# EAGLE board CT_schematic (EAGLE 7.6.0)

Size 100 x 80 mm. Coordinates in mm from the lower left corner, seen from the top.
Outline: 0,0 100,0 100,80 0,80 0,0
Copper layers (1*16): Top 0.035mm / dielectric 1.5mm / Bottom 0.035mm
Design rules "default": minimum track width 10mil, minimum drill 24mil, track to track 8mil, track to pad 8mil, pad to pad 8mil, via to via 8mil, smd to smd 8mil, copper to edge 40mil, drill to drill 8mil, minimum pad ring 10mil, minimum via ring 8mil, stop-mask expansion 4mil, vias tented up to drill 0mil, thermal gap 10mil

## Footprints (pad centres in the part's own frame; a part is rotated, then mirrored left to right if it is on the bottom)
C0603 = smd 0.8 x 0.8: 1 -0.762,0; 2 0.762,0
C0402 = smd 0.5 x 0.5: 1 -0.508,0; 2 0.508,0
C1206 = smd 1.3 x 1.6: 1 -1.524,0; 2 1.524,0
C0805 = smd 1.2 x 1.3: 1 -1.016,0; 2 1.016,0
C1210 = smd 1.2 x 2.5: 1 -1.524,0; 2 1.524,0
EXV-9H = smd 3.505 x 1.676: 1 -2.857,0; 2 2.857,0
L0603 = smd 0.8 x 0.8: 1 -0.762,0; 2 0.762,0
L1210 = smd 1.2 x 2.5: 1 -1.524,0; 2 1.524,0
PJ-037B_PACKAGE = drill 3.7 square: 1 12,0 | drill 3.2 square: 2 6,0
R0603 = smd 0.8 x 0.8: 1 -0.762,0; 2 0.762,0
WLCSP180 = smd 0.225 x 0.225: A1 -2.4,2.6; A2 -2,2.6; A3 -1.6,2.6; A4 -1.2,2.6; A5 -0.8,2.6; A6 -0.4,2.6; A7 0,2.6; A8 0.4,2.6; A9 0.8,2.6; A10 1.2,2.6; A11 1.6,2.6; A12 2,2.6; A13 2.4,2.6; B1 -2.4,2.2; B2 -2,2.2; B3 -1.6,2.2; B4 -1.2,2.2; B5 -0.8,2.2; B6 -0.4,2.2; B7 0,2.2; B8 0.4,2.2; B9 0.8,2.2; B10 1.2,2.2; B11 1.6,2.2; B12 2,2.2; B13 2.4,2.2; C1 -2.4,1.8; C2 -2,1.8; C3 -1.6,1.8; C4 -1.2,1.8; C5 -0.8,1.8; C6 -0.4,1.8; C7 0,1.8; C8 0.4,1.8; C9 0.8,1.8; C10 1.2,1.8; C11 1.6,1.8; C12 2,1.8; C13 2.4,1.8; D1 -2.4,1.4; D2 -2,1.4; D3 -1.6,1.4; D4 -1.2,1.4; D5 -0.8,1.4; D6 -0.4,1.4; D7 0,1.4; D8 0.4,1.4; D9 0.8,1.4; D10 1.2,1.4; D11 1.6,1.4; D12 2,1.4; D13 2.4,1.4; E1 -2.4,1; E2 -2,1; E3 -1.6,1; E4 -1.2,1; E5 -0.8,1; E6 -0.4,1; E7 0,1; E8 0.4,1; E9 0.8,1; E10 1.2,1; E11 1.6,1; E12 2,1; E13 2.4,1; F1 -2.4,0.6; F2 -2,0.6; F3 -1.6,0.6; F4 -1.2,0.6; F5 -0.8,0.6; F6 -0.4,0.6; F7 0,0.6; F8 0.4,0.6; F9 0.8,0.6; F10 1.2,0.6; F11 1.6,0.6; F12 2,0.6; F13 2.4,0.6; G1 -2.4,0.2; G2 -2,0.2; G3 -1.6,0.2; G4 -1.2,0.2; G5 -0.8,0.2; G6 -0.4,0.2; G8 0.4,0.2; G9 0.8,0.2; G10 1.2,0.2; G11 1.6,0.2; G12 2,0.2; G13 2.4,0.2; H1 -2.4,-0.2; H2 -2,-0.2; H3 -1.6,-0.2; H4 -1.2,-0.2; H5 -0.8,-0.2; H6 -0.4,-0.2; H8 0.4,-0.2; H9 0.8,-0.2; H10 1.2,-0.2; H11 1.6,-0.2; H12 2,-0.2; H13 2.4,-0.2; J1 -2.4,-0.6; J2 -2,-0.6; J3 -1.6,-0.6; J4 -1.2,-0.6; J5 -0.8,-0.6; J6 -0.4,-0.6; J7 0,-0.6; J8 0.4,-0.6; J9 0.8,-0.6; J10 1.2,-0.6; J11 1.6,-0.6; J12 2,-0.6; J13 2.4,-0.6; K1 -2.4,-1; K2 -2,-1; K3 -1.6,-1; K4 -1.2,-1; K5 -0.8,-1; K6 -0.4,-1; K7 0,-1; K8 0.4,-1; K9 0.8,-1; K10 1.2,-1; K11 1.6,-1; K12 2,-1; K13 2.4,-1; L1 -2.4,-1.4; L2 -2,-1.4; L3 -1.6,-1.4; L4 -1.2,-1.4; L5 -0.8,-1.4; L6 -0.4,-1.4; L7 0,-1.4; L8 0.4,-1.4; L9 0.8,-1.4; L10 1.2,-1.4; L11 1.6,-1.4; L12 2,-1.4; L13 2.4,-1.4; M1 -2.4,-1.8; M2 -2,-1.8; M3 -1.6,-1.8; M4 -1.2,-1.8; M5 -0.8,-1.8; M6 -0.4,-1.8; M7 0,-1.8; M8 0.4,-1.8; M9 0.8,-1.8; M10 1.2,-1.8; M11 1.6,-1.8; M12 2,-1.8; M13 2.4,-1.8; N1 -2.4,-2.2; N2 -2,-2.2; N3 -1.6,-2.2; N4 -1.2,-2.2; N5 -0.8,-2.2; N6 -0.4,-2.2; N7 0,-2.2; N8 0.4,-2.2; N9 0.8,-2.2; N10 1.2,-2.2; N11 1.6,-2.2; N12 2,-2.2; N13 2.4,-2.2; P1 -2.4,-2.6; P2 -2,-2.6; P3 -1.6,-2.6; P4 -1.2,-2.6; P5 -0.8,-2.6; P6 -0.4,-2.6; P7 0,-2.6; P8 0.4,-2.6; P9 0.8,-2.6; P10 1.2,-2.6; P11 1.6,-2.6; P12 2,-2.6; P13 2.4,-2.6
SOIC-8 = smd 1.6 x 0.6: 1 -2.7,1.905 | smd 1.55 x 0.6: 2 -2.7,0.635; 3 -2.7,-0.635; 4 -2.7,-1.905; 5 2.7,-1.905; 6 2.7,-0.635; 7 2.7,0.635; 8 2.7,1.905
LH430WV2-SD01 = smd 0.23 x 0.7: 1 0,0; 2 -0.4,0; 3 -0.8,0; 4 -1.2,0; 5 -1.6,0; 6 -2,0; 7 -2.4,0; 8 -2.8,0; 9 -3.2,0; 10 -3.6,0; 11 -4,0; 12 -4.4,0; 13 -4.8,0; 14 -5.2,0; 15 -5.6,0; 16 -5.6,-2.15; 17 -5.2,-2.15; 18 -4.8,-2.15; 19 -4.4,-2.15; 20 -4,-2.15; 21 -3.6,-2.15; 22 -3.2,-2.15; 23 -2.8,-2.15; 24 -2.4,-2.15; 25 -2,-2.15; 26 -1.6,-2.15; 27 -1.2,-2.15; 28 -0.8,-2.15; 29 -0.4,-2.15; 30 0,-2.15
TDFN-8/6MM = smd 0.3 x 0.75: 1 0,0; 2 0.5,0; 3 1,0; 4 1.5,0; 5 1.5,3; 6 1,3; 7 0.5,3; 8 0,3
WFDN-8 = smd 0.48 x 0.7: 1 0,0; 2 1.27,0; 3 2.54,0; 4 3.81,0; 5 3.81,4.45; 6 2.54,4.45; 7 1.27,4.45; 8 0,4.45 | smd 4 x 3: 9 1.89,2.25
ABS07-32.768KHZ-7-T = smd 1.1 x 2.4: 1 -2.5,0; 2 0,0
ASFL1 = smd 1.7 x 1.5: 1 -1.27,-1.1; 2 1.27,-1.1; 3 1.27,1.1; 4 -1.27,1.1
WSON-8 = smd 0.3 x 0.6: 1 -0.75,0; 2 0.05,0; 3 0.85,0; 4 1.65,0; 5 1.65,3.8; 6 0.85,3.8; 7 0.05,3.8; 8 -0.75,3.8 | smd 3 x 2.6: PAD 0.45,1.9
SOIC-8_EP = smd 1.6 x 0.533: 1 -2.921,1.905; 2 -2.921,0.635; 3 -2.921,-0.635; 4 -2.921,-1.905; 5 2.921,-1.905; 6 2.921,-0.635; 7 2.921,0.635; 8 2.921,1.905 | smd 2.54 x 3.302: EPAD 0,0 | drill 0.406 pad 0.406: P$1 -0.508,0.635; P$2 0.381,0.635; P$3 -0.508,-0.635; P$4 0.381,-0.635
DFN-8_DDB = smd 0.805 x 0.3: 1 -0.952,0.75; 2 -0.952,0.25; 3 -0.952,-0.25; 4 -0.952,-0.75; 5 0.952,-0.75; 6 0.952,-0.25; 7 0.952,0.25; 8 0.952,0.75 | smd 0.61 x 2.2: 9 0,0
SON-6 = smd 0.55 x 0.3: 1 -0.355,0.5 | smd 0.52 x 0.3: 2 -0.37,0; 3 -0.37,-0.5; 4 0.37,-0.5; 5 0.37,0; 6 0.37,0.5
SW_4-1437565-2 = smd 1.4 x 2.1: 1 -2.23,4.55; 2 -2.23,-4.55; 3 2.23,4.55; 4 2.23,-4.55
LGM67K-G1J2-24-Z = smd 0.8 x 1.4: A -2,0; C 0,0
NC7SZ125M5X = smd 1.3 x 0.7: 1 -1.3,0.95; 2 -1.3,0; 3 -1.3,-0.95; 4 1.3,-0.95; 5 1.3,0.95

## Placement (x,y rotation side)
C1  1e-06  [C0603]  -15.24,63.5 0 top  (outside the outline)
C2  1e-07  [C0603]  -19.05,63.5 0 top  (outside the outline)
C3  1e-07  [C0603]  -22.86,63.5 0 top  (outside the outline)
C4  1e-07  [C0603]  -26.67,63.5 0 top  (outside the outline)
C5  1e-07  [C0603]  -30.48,63.5 0 top  (outside the outline)
C6  1e-07  [C0603]  -34.29,63.5 0 top  (outside the outline)
C7  1e-07  [C0603]  -38.1,63.5 0 top  (outside the outline)
C8  1e-07  [C0603]  -41.91,63.5 0 top  (outside the outline)
C9  1e-07  [C0603]  -45.72,63.5 0 top  (outside the outline)
C10  4.7e-06  [C0603]  -64.77,58.42 0 top  (outside the outline)
C11  1e-07  [C0603]  -49.53,63.5 0 top  (outside the outline)
C12  1e-08  [C0603]  -53.34,63.5 0 top  (outside the outline)
C13  1e-06  [C0603]  -57.15,63.5 0 top  (outside the outline)
C14  1e-07  [C0603]  -60.96,63.5 0 top  (outside the outline)
C15  2.2e-06  [C0603]  -68.58,58.42 0 top  (outside the outline)
C16  1e-07  [C0603]  -64.77,63.5 0 top  (outside the outline)
C17  1e-07  [C0603]  -68.58,63.5 0 top  (outside the outline)
C18  1e-11  [C0402]  -15.24,73.66 0 top  (outside the outline)
C19  1e-11  [C0402]  -19.05,73.66 0 top  (outside the outline)
C20  1e-08  [C0402]  -22.86,73.66 0 top  (outside the outline)
C21  1e-07  [C0402]  -26.67,73.66 0 top  (outside the outline)
C22  1e-07  [C0402]  -30.48,73.66 0 top  (outside the outline)
C23  1e-07  [C0402]  -34.29,73.66 0 top  (outside the outline)
C24  1e-07  [C0402]  -38.1,73.66 0 top  (outside the outline)
C25  1e-07  [C0402]  -41.91,73.66 0 top  (outside the outline)
C26  1e-08  [C0402]  -45.72,73.66 0 top  (outside the outline)
C27  1e-07  [C0402]  -49.53,73.66 0 top  (outside the outline)
C28  1e-08  [C0402]  -53.34,73.66 0 top  (outside the outline)
C29  1e-08  [C0402]  -57.15,73.66 0 top  (outside the outline)
C30  1e-05  [C1206]  -67.31,45.72 0 top  (outside the outline)
C31  1e-05  [C0805]  -34.29,53.34 0 top  (outside the outline)
C32  1e-05  [C1210]  -16.51,46.99 0 top  (outside the outline)
C33  1e-05  [C1210]  -22.86,46.99 0 top  (outside the outline)
C34  1e-05  [C1210]  -29.21,46.99 0 top  (outside the outline)
C35  1e-05  [C1210]  -35.56,46.99 0 top  (outside the outline)
C36  1e-08  [C0402]  -60.96,73.66 0 top  (outside the outline)
C37  1e-05  [C1206]  -73.66,45.72 0 top  (outside the outline)
C38  1e-05  [C1210]  -41.91,46.99 0 top  (outside the outline)
C39  1e-08  [C0402]  -64.77,73.66 0 top  (outside the outline)
C40  1e-05  [C1206]  -16.51,53.34 0 top  (outside the outline)
C41  1e-05  [C1210]  -48.26,46.99 0 top  (outside the outline)
C42  1e-05  [C1210]  -54.61,46.99 0 top  (outside the outline)
C43  2.2e-06  [C0603]  -72.39,58.42 0 top  (outside the outline)
C44  2.2e-07  [C0603]  -76.2,58.42 0 top  (outside the outline)
C45  1e-07  [C0402]  -68.58,73.66 0 top  (outside the outline)
C46  0.0001  [EXV-9H]  -17.78,39.37 0 top  (outside the outline)
C47  0.0001  [EXV-9H]  -29.21,39.37 0 top  (outside the outline)
C48  1e-08  [C0402]  -72.39,73.66 0 top  (outside the outline)
C49  1e-08  [C0402]  -76.2,73.66 0 top  (outside the outline)
F1  240.0  [L0603]  -72.39,63.5 0 top  (outside the outline)
I1  1e-05  [L1210]  -60.96,46.99 0 top  (outside the outline)
J1  PJ-037B  [PJ-037B_PACKAGE]  -27.94,7.62 0 top  (outside the outline)
R2  1000.0  [R0603]  -76.2,63.5 0 top  (outside the outline)
R4  4700.0  [R0603]  -15.24,68.58 0 top  (outside the outline)
R5  4700.0  [R0603]  -19.05,68.58 0 top  (outside the outline)
R6  2200.0  [R0603]  -22.86,68.58 0 top  (outside the outline)
R7  2200.0  [R0603]  -26.67,68.58 0 top  (outside the outline)
R8  2200.0  [R0603]  -30.48,68.58 0 top  (outside the outline)
R9  10000.0  [R0603]  -25.4,58.42 0 top  (outside the outline)
R10  10000.0  [R0603]  -30.48,58.42 0 top  (outside the outline)
R11  10000.0  [R0603]  -35.56,58.42 0 top  (outside the outline)
R12  10000.0  [R0603]  -40.64,58.42 0 top  (outside the outline)
R13  10000.0  [R0603]  -45.72,58.42 0 top  (outside the outline)
R14  10000.0  [R0603]  -50.8,58.42 0 top  (outside the outline)
R15  100000.0  [R0603]  -44.45,52.07 0 top  (outside the outline)
R16  100000.0  [R0603]  -49.53,52.07 0 top  (outside the outline)
R17  100000.0  [R0603]  -54.61,52.07 0 top  (outside the outline)
R18  100000.0  [R0603]  -59.69,52.07 0 top  (outside the outline)
R19  200.0  [R0603]  -34.29,68.58 0 top  (outside the outline)
R20  1000.0  [R0603]  -38.1,68.58 0 top  (outside the outline)
R21  910.0  [R0603]  -41.91,68.58 0 top  (outside the outline)
R22  2200.0  [R0603]  -45.72,68.58 0 top  (outside the outline)
R23  100000.0  [R0603]  -64.77,52.07 0 top  (outside the outline)
R24  1800.0  [R0603]  -49.53,68.58 0 top  (outside the outline)
R25  1000.0  [R0603]  -53.34,68.58 0 top  (outside the outline)
R26  100000.0  [R0603]  -69.85,52.07 0 top  (outside the outline)
R27  2231.0  [R0603]  -57.15,68.58 0 top  (outside the outline)
R28  1000.0  [R0603]  -60.96,68.58 0 top  (outside the outline)
R29  100000.0  [R0603]  -74.93,52.07 0 top  (outside the outline)
R30  1600000.0  [R0603]  -39.37,52.07 0 top  (outside the outline)
R31  10000.0  [R0603]  -55.88,58.42 0 top  (outside the outline)
R32  10000.0  [R0603]  -60.96,58.42 0 top  (outside the outline)
R33  9100.0  [R0603]  -64.77,68.58 0 top  (outside the outline)
R34  680000.0  [R0603]  -15.24,58.42 0 top  (outside the outline)
R35  120000.0  [R0603]  -20.32,58.42 0 top  (outside the outline)
U1  STM32F779AIY6TR  [WLCSP180]  -16.51,19.05 0 top  (outside the outline)
U2  AT25160B-SSHL-T  [SOIC-8]  -48.26,19.05 0 top  (outside the outline)
U3  LH430WV2-SD01  [LH430WV2-SD01]  -68.58,69.85 0 top  (outside the outline)
U4  24AA02T-I/MNY  [TDFN-8/6MM]  -33.02,19.05 0 top  (outside the outline)
U5  SST26VF032B-104I/MF  [WFDN-8]  -67.31,3.81 0 top  (outside the outline)
U6  ABS07-32.768KHZ-7-T  [ABS07-32.768KHZ-7-T]  -50.8,39.37 0 top  (outside the outline)
U7  ASFL1-25MHZ-NCS  [ASFL1]  -67.31,30.48 0 top  (outside the outline)
U8  LP3878SDX-ADJ/NOPB  [WSON-8]  -69.85,17.78 0 top  (outside the outline)
U9  MIC5234YME  [SOIC-8_EP]  -59.69,38.1 0 top  (outside the outline)
U10  LP3878SDX-ADJ/NOPB  [WSON-8]  -30.48,27.94 0 top  (outside the outline)
U11  LP3878SDX-ADJ/NOPB  [WSON-8]  -50.8,27.94 0 top  (outside the outline)
U12  LT3494AEDDB#TRMPBF  [DFN-8_DDB]  -15.24,77.47 0 top  (outside the outline)
U13  TPS3895ADRYR  [SON-6]  -20.32,77.47 0 top  (outside the outline)
U14  4-1437565-2  [SW_4-1437565-2]  -44.45,6.35 0 top  (outside the outline)
U15  Q65110A2395  [LGM67K-G1J2-24-Z]  -68.58,38.1 0 top  (outside the outline)
U16  nc7sz125m5x  [NC7SZ125M5X]  -21.59,52.07 0 top  (outside the outline)
U17  nc7sz125m5x  [NC7SZ125M5X]  -27.94,52.07 0 top  (outside the outline)

## Library data of the parts
C1-C49 F1 I1 J1 R2 R4-R35 U1-U17 = circuit_tree

## Nets
CLK_CRYSTAL_U1_E12: C18.1 U1.E12 U6.1
CLK_CRYSTAL_U1_E13: C19.1 U1.E13 U6.2
CLK_U1_K12: U1.K12 U7.3
GND: C1.2 C2.2 C3.2 C4.2 C5.2 C6.2 C7.2 C8.2 C9.2 C10.2 C11.2 C12.2 C13.2 C14.2 C15.2 C16.2 C17.2 C18.2 C19.2 C20.2 C21.2 C22.2 C23.2 C24.2 C25.2 C26.2 C27.2 C28.2 C29.2 C30.2 C31.2 C32.2 C33.2 C34.2 C35.2 C36.2 C37.2 C38.2 C39.2 C40.2 C41.2 C42.2 C43.2 C44.2 C45.2 C46.2 C47.2 C48.2 C49.2 J1.2 R2.2 R9.2 R14.2 R20.2 R22.2 R25.2 R28.2 R33.2 R35.2 U1.A8 U1.A11 U1.B6 U1.C2 U1.F1 U1.F13 U1.H5 U1.J9 U1.J13 U1.M1 U1.M11 U1.N4 U1.N5 U1.P9 U2.4 U3.1 U3.6 U3.9 U3.12 U3.15 U3.17 U3.18 U3.19 U3.24 U3.27 U4.4 U4.7 U5.4 U5.9 U7.2 U8.3 U8.PAD U9.7 U9.EPAD U10.3 U10.PAD U11.3 U11.PAD U12.2 U12.9 U13.2 U15.C U16.1 U16.3 U17.1 U17.3
NET_U1_A10: R9.1 U1.A10
NET_U1_B9: R6.1 U1.B9 U4.6
NET_U1_C1: C17.1 U1.C1
NET_U1_C8: R7.1 U1.C8 U4.5
NET_U1_C10: R10.1 U1.C10
NET_U1_J3: C15.1 U1.H6 U1.J3
NET_U1_L11: R5.1 U1.L11 U17.4
NET_U1_M12: C12.1 C13.1 F1.1 U1.M12
NET_U1_P10: U15.A
NET_U1_P11: U14.3 U14.4
NET_U2_3: R11.1 U2.3
NET_U2_7: R13.1 U2.7
NET_U3_4: R4.1 U3.4 U16.4
NET_U3_5: R8.1
NET_U3_20: R14.1 U3.20
NET_U8_1: C29.1 U8.1
NET_U8_6: R19.2 R20.1 U8.6
NET_U8_8: R18.1 U8.8
NET_U9_4: R21.2 R22.1 U9.4
NET_U10_1: C36.1 U10.1
NET_U10_6: R24.2 R25.1 U10.6
NET_U10_8: R23.1 U10.8
NET_U11_1: C39.1 U11.1
NET_U11_6: R27.2 R28.1 U11.6
NET_U11_8: R26.1 U11.8
NET_U12_1: I1.1 U12.1
NET_U12_5: R29.1 U12.5
NET_U12_6: R30.1 U12.6
NET_U12_8: C44.1 U12.8
NET_U13_1: R32.1 R33.1 U13.1
NET_U13_3: R34.2 R35.1 U13.3
NET_U13_4: R31.1 U13.4 U16.2 U17.2
NET_U14_1: R2.1 U14.1 U14.2
PROC_DSIHOST_CKN: U1.H3 U3.13
PROC_DSIHOST_CKP: U1.H4 U3.14
PROC_DSIHOST_D0N: U1.J2 U3.7
PROC_DSIHOST_D0P: U1.J1 U3.8
PROC_DSIHOST_D1N: U1.H2 U3.10
PROC_DSIHOST_D1P: U1.H1 U3.11
PROC_QUADSPI_BK1_IO0: U1.E1 U5.5
PROC_QUADSPI_BK1_IO1: U1.B4 U5.2
PROC_QUADSPI_BK1_IO2: R16.1 U1.E10 U5.3
PROC_QUADSPI_BK1_IO3: R17.1 U1.J11 U5.7
PROC_QUADSPI_BK1_NCS: R15.1 U1.K5 U5.1
PROC_QUADSPI_CLK: U1.J7 U5.6
PROC_SPI1_MISO: U1.C6 U2.2
PROC_SPI1_MOSI: U1.A9 U2.5
PROC_SPI1_NSS: R12.1 U1.A7 U2.1
PROC_SPI1_SCK: U1.B7 U2.6
VCC_S1_10V6: C30.1 C32.1 C33.1 C37.1 C40.1 C42.1 C46.1 C47.1 I1.2 J1.1 R18.2 R23.2 R26.2 R29.2 U8.4 U9.5 U9.8 U10.4 U11.4 U12.3 U12.4
VCC_TIER1_1V2: C16.1 C31.1 R19.1 U1.P5 U8.5
VCC_TIER1_1V5: C34.1 C35.1 R21.1 U3.29 U9.1
VCC_TIER1_2V8: C23.1 C24.1 C25.1 C38.1 R24.1 U3.16 U3.21 U3.22 U3.23 U10.5
VCC_TIER1_3V3: C1.1 C2.1 C3.1 C4.1 C5.1 C6.1 C7.1 C8.1 C9.1 C10.1 C11.1 C14.1 C20.1 C21.1 C26.1 C27.1 C28.1 C41.1 C45.1 C48.1 C49.1 F1.2 R4.2 R5.2 R6.2 R7.2 R8.2 R10.2 R11.2 R12.2 R13.2 R15.2 R16.2 R17.2 R27.1 R31.2 R32.2 R34.1 U1.A6 U1.B2 U1.B8 U1.B11 U1.C13 U1.F2 U1.F12 U1.J12 U1.K1 U1.K9 U1.M8 U1.P4 U2.8 U3.2 U4.8 U5.8 U7.4 U11.5 U13.6 U16.5 U17.5
VCC_TIER1_12V0: C22.1 C43.1 R30.2 U3.30 U12.7

## Tracks (layer width: path | path; a pad name or v marks a point on that pad's centre or on a via)
CLK_CRYSTAL_U1_E12  (2 unrouted)
CLK_CRYSTAL_U1_E13  (2 unrouted)
CLK_U1_K12  (1 unrouted)
GND  (104 unrouted)
NET_U1_A10  (1 unrouted)
NET_U1_B9  (2 unrouted)
NET_U1_C1  (1 unrouted)
NET_U1_C8  (2 unrouted)
NET_U1_C10  (1 unrouted)
NET_U1_J3  (2 unrouted)
NET_U1_L11  (2 unrouted)
NET_U1_M12  (3 unrouted)
NET_U1_P11  (1 unrouted)
NET_U2_3  (1 unrouted)
NET_U2_7  (1 unrouted)
NET_U3_4  (2 unrouted)
NET_U3_20  (1 unrouted)
NET_U8_1  (1 unrouted)
NET_U8_6  (2 unrouted)
NET_U8_8  (1 unrouted)
NET_U9_4  (2 unrouted)
NET_U10_1  (1 unrouted)
NET_U10_6  (2 unrouted)
NET_U10_8  (1 unrouted)
NET_U11_1  (1 unrouted)
NET_U11_6  (2 unrouted)
NET_U11_8  (1 unrouted)
NET_U12_1  (1 unrouted)
NET_U12_5  (1 unrouted)
NET_U12_6  (1 unrouted)
NET_U12_8  (1 unrouted)
NET_U13_1  (2 unrouted)
NET_U13_3  (2 unrouted)
NET_U13_4  (3 unrouted)
NET_U14_1  (2 unrouted)
PROC_DSIHOST_CKN  (1 unrouted)
PROC_DSIHOST_CKP  (1 unrouted)
PROC_DSIHOST_D0N  (1 unrouted)
PROC_DSIHOST_D0P  (1 unrouted)
PROC_DSIHOST_D1N  (1 unrouted)
PROC_DSIHOST_D1P  (1 unrouted)
PROC_QUADSPI_BK1_IO0  (1 unrouted)
PROC_QUADSPI_BK1_IO1  (1 unrouted)
PROC_QUADSPI_BK1_IO2  (2 unrouted)
PROC_QUADSPI_BK1_IO3  (2 unrouted)
PROC_QUADSPI_BK1_NCS  (2 unrouted)
PROC_QUADSPI_CLK  (1 unrouted)
PROC_SPI1_MISO  (1 unrouted)
PROC_SPI1_MOSI  (1 unrouted)
PROC_SPI1_NSS  (2 unrouted)
PROC_SPI1_SCK  (1 unrouted)
VCC_S1_10V6  (20 unrouted)
VCC_TIER1_1V2  (4 unrouted)
VCC_TIER1_1V5  (4 unrouted)
VCC_TIER1_2V8  (9 unrouted)
VCC_TIER1_3V3  (58 unrouted)
VCC_TIER1_12V0  (4 unrouted)